# Altium PCB FPGA_Quatro_PCB.PcbDoc (part 2 of 2)
Units mil, origin at the board's own origin, x right, y up, seen from the top; angles counter-clockwise.
Board outline 4724.41 x 3937.01 mil, 4 copper layers (Top Layer, Layer 2, Layer 3, Bottom Layer), stack 65.634 mil thick; 119 components, 184 nets, 749 pads, 206 vias.
Unrouted connection lines stored in the file: 83.
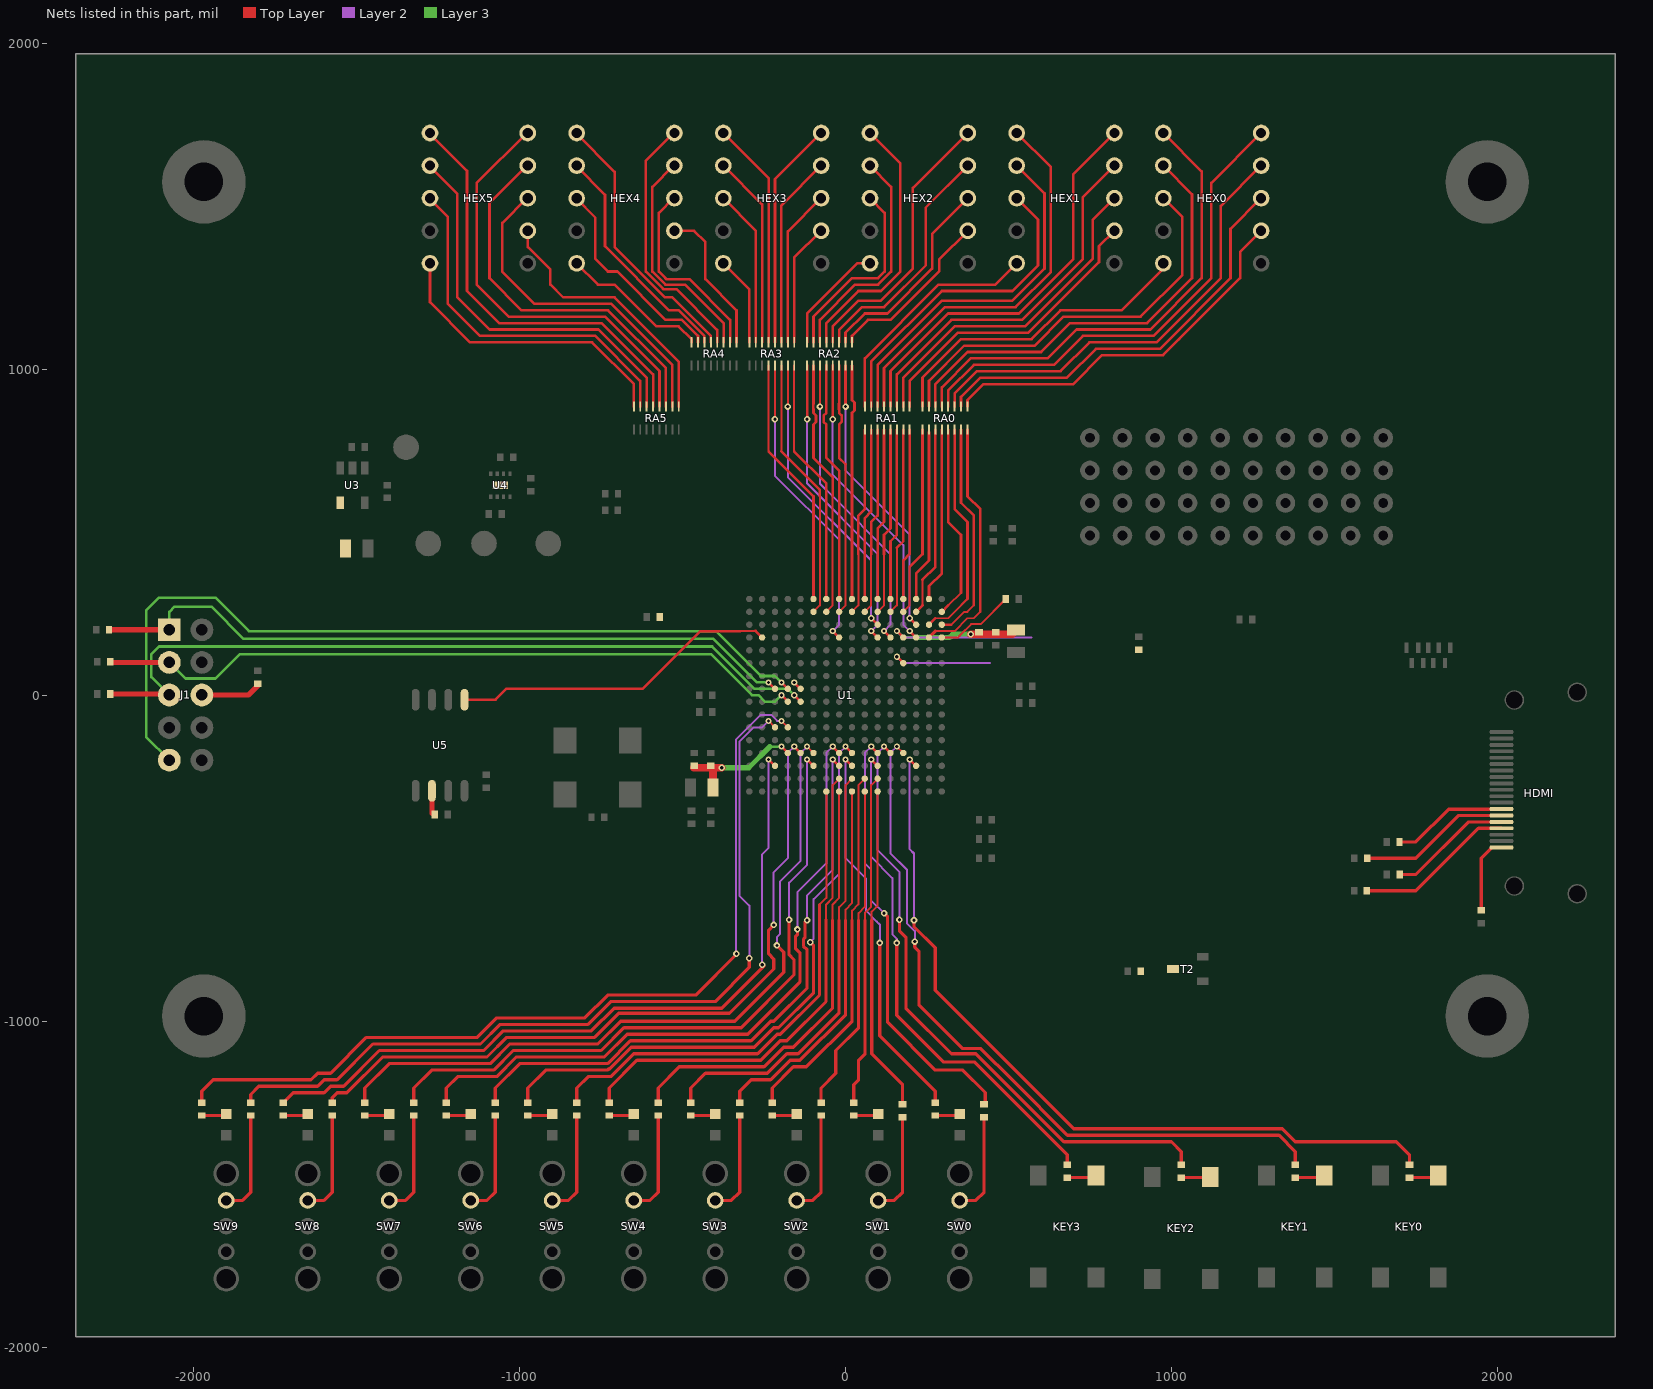
[diagram p4: the nets of this part, all layers, seen from the top]

## Via types
v1: diameter 19, hole 10, Top Layer to Bottom Layer, tented both sides, 111 vias
v2: diameter 20, hole 10, Top Layer to Bottom Layer, tented both sides, 72 vias
v3: diameter 35.43, hole 19.68, Top Layer to Bottom Layer, tented both sides, 23 vias

## Nets (pads, with @x,y where several pads share a name; then routed paths per layer and width w, separated by ;. In a path a pad name is that pad's centre, name@x,y a point inside that pad or via, vN(x,y) a via of type N, cw(c..) or ccw(c..) an arc to the next point about the centre after c; other vN are vias at no path point) (continued)
HEX2.D: RA3.13 U1.D8 | length 932.5
  Top Layer w6: v2(-216.54,846.46) RA3.13@-216.53,1011.81
  Top Layer w8: v1(-39.37,196.85) U1.D8@-19.68,177.16
  Layer 2 w6: v2(-216.54,846.46) -216.54,673.23 -19.68,476.38 -19.68,216.53 v1(-39.37,196.85)
HEX2.DP: RA3.12 U1.A6 | length 773.6
  Top Layer w6: -236.22,748.03 RA3.12@-236.22,1011.81
  Top Layer w8: -236.22,748.03 -98.43,610.24 -98.43,590.55 U1.A6@-98.42,295.28
HEX2.E: RA3.16 U1.A7 | length 757.3
  Top Layer w6: -157.48,748.03 RA3.16@-157.48,1011.81
  Top Layer w8: -157.48,748.03 -59.06,649.61 -59.06,610.24 U1.A7@-59.05,295.28
HEX2.F: RA3.15 U1.C11 | length 909.4
  Top Layer w6: v2(-177.17,885.83) RA3.15@-177.16,1011.81
  Top Layer w8: v1(78.74,236.22) U1.C11@98.43,216.53
  Layer 2 w6: v2(-177.17,885.83) -177.17,669.29 78.74,413.39 v1(78.74,236.22)
HEX2.G: RA3.14 U1.B6 | length 813
  Top Layer w6: -196.85,748.03 RA3.14@-196.85,1011.81 ; U1.B6@-98.42,255.91 -78.74,275.59 -78.74,610.24
  Top Layer w8: -196.85,748.03 -78.74,629.92 -78.74,610.24
HEX3.A: RA2.9 U1.D11 | length 940.6
  Top Layer w8: v2(-118.11,846.46) RA2.9@-118.11,1011.81 ; v1(78.74,196.85) U1.D11@98.43,177.16
  Layer 2 w6: v2(-118.11,846.46) -118.11,657.48 -118.11,649.61 98.43,433.07 98.43,216.53 v1(78.74,196.85)
HEX3.B: RA2.10 U1.B7 | length 795.3
  Top Layer w6: U1.B7@-59.05,255.91 -39.37,275.59 -39.37,610.24
  Top Layer w8: RA2.10@-98.42,1011.81 -98.42,894.43 -98.74,894.11 -98.74,877.54 -98.42,877.23 -98.42,866.14 -90.55,858.27 -90.55,838.58 -98.42,830.71 -98.42,728.35 -39.37,669.29 -39.37,610.24
HEX3.C: RA2.11 U1.D12 | length 940.6
  Top Layer w6: v2(-78.74,885.83) RA2.11@-78.74,1011.81
  Top Layer w8: v1(118.11,196.85) U1.D12@137.8,177.16
  Layer 2 w6: v2(-78.74,885.83) -78.74,649.61 -39.37,610.24 137.8,433.07 137.8,216.53 v1(118.11,196.85)
HEX3.D: RA2.13 U1.D14 | length 940.6
  Top Layer w8: v2(-39.37,846.46) RA2.13@-39.37,1011.81 ; v1(196.85,196.85) U1.D14@216.54,177.16
  Layer 2 w6: v2(-39.37,846.46) -39.37,677.17 177.17,460.63 177.17,216.53 v1(196.85,196.85)
HEX3.DP: RA2.12 U1.A8 | length 739.6
  Top Layer w8: RA2.12@-59.05,1011.81 -59.05,894.43 -58.74,894.11 -58.74,877.54 -59.05,877.23 -59.05,866.14 -66.93,858.27 -66.93,838.58 -59.05,830.71 -59.05,728.35 -19.69,688.98 -19.69,610.24 U1.A8@-19.68,295.28
HEX3.E: RA2.16 U1.A9 | length 723.1
  Top Layer w8: U1.A9@19.69,295.28 19.69,511.81 19.69,866.14 27.56,874.02 27.56,897.64 19.69,905.51 RA2.16@19.69,1011.81
HEX3.F: RA2.15 U1.C14 | length 885
  Top Layer w8: v2(0,885.83) RA2.15@0,1011.81 ; v1(196.85,236.22) U1.C14@216.54,216.53
  Layer 2 w6: v2(0,885.83) 0,688.98 196.85,492.13 v1(196.85,236.22)
HEX3.G: RA2.14 U1.B8 | length 779.3
  Top Layer w6: U1.B8@-19.68,255.91 0,275.59 0,708.66 ; RA2.14@-19.68,1011.81 RA2.14@-19.5,1011.62
  Top Layer w8: RA2.14@-19.68,1011.81 -19.68,894.43 -20,894.11 -20,877.54 -19.68,877.23 -19.68,866.14 -11.81,858.27 -11.81,838.58 -19.69,830.71 -19.69,728.35 0,708.66
HEX4.A: RA1.9 U1.B9 | length 575.4
  Top Layer w6: U1.B9@19.69,255.91 39.37,275.59 39.37,433.07
  Top Layer w8: 39.37,433.07 39.37,551.18 59.06,570.87 RA1.9@59.06,814.96
HEX4.B: RA1.10 U1.A10 | length 527.8
  Top Layer w8: U1.A10@59.06,295.28 59.06,433.07 59.06,543.31 78.74,562.99 78.74,629.92 RA1.10@78.74,814.96
HEX4.C: RA1.11 U1.B10 | length 575.4
  Top Layer w6: U1.B10@59.06,255.91 78.74,275.59 78.74,433.07
  Top Layer w8: 78.74,433.07 78.74,531.5 98.43,551.18 98.43,570.87 RA1.11@98.43,814.96
HEX4.D: RA1.13 U1.B11 | length 575.4
  Top Layer w6: U1.B11@98.43,255.91 118.11,275.59 118.11,433.07
  Top Layer w8: 118.11,433.07 118.11,492.13 137.8,511.81 137.8,629.92 RA1.13@137.8,814.96
HEX4.DP: RA1.12 U1.A11 | length 527.8
  Top Layer w8: U1.A11@98.43,295.28 98.43,433.07 98.43,511.81 118.11,531.5 118.11,629.92 RA1.12@118.11,814.96
HEX4.E: RA1.16 U1.A13 | length 527.8
  Top Layer w8: U1.A13@177.17,295.28 177.17,413.39 196.85,433.07 196.85,629.92 RA1.16@196.85,814.96
HEX4.F: RA1.15 U1.B12 | length 575.4
  Top Layer w6: U1.B12@137.8,255.91 157.48,275.59 157.48,452.76
  Top Layer w8: 157.48,452.76 177.17,472.44 177.17,629.92 RA1.15@177.17,814.96
HEX4.G: RA1.14 U1.A12 | length 527.8
  Top Layer w8: U1.A12@137.8,295.28 137.8,433.07 137.8,472.44 157.48,492.13 157.48,629.92 RA1.14@157.48,814.96
HEX5.A: RA0.9 U1.B13 | length 583.5
  Top Layer w6: U1.B13@177.17,255.91 196.85,275.59 196.85,393.7
  Top Layer w8: 196.85,393.7 236.22,433.07 236.22,570.87 RA0.9@236.22,814.96
HEX5.B: RA0.10 U1.A14 | length 528.1
  Top Layer w8: U1.A14@216.54,295.28 216.54,374.02 255.91,413.39 255.91,570.87 RA0.10@255.91,807.09
HEX5.C: RA0.11 U1.B14 | length 583.5
  Top Layer w6: 236.22,275.59 236.22,354.33
  Top Layer w8: U1.B14@216.54,255.91 236.22,275.59 ; 236.22,354.33 275.59,393.7 275.59,570.87 RA0.11@275.59,814.96
HEX5.D: RA0.13 U1.B16 | length 599.8
  Top Layer w6: 314.96,275.59 354.33,314.96
  Top Layer w8: U1.B16@295.28,255.91 314.96,275.59 ; RA0.13@314.96,814.96 314.96,570.87 314.96,531.5 354.33,492.13 354.33,314.96
HEX5.DP: RA0.12 U1.A15 | length 536
  Top Layer w8: U1.A15@255.91,295.28 255.91,334.65 295.28,374.02 295.28,551.18 RA0.12@295.28,814.96
HEX5.E: RA0.16 U1.D15 | length 765.5
  Top Layer w6: 275.59,196.85 334.65,196.85 374.02,236.22 393.7,236.22 413.39,255.91
  Top Layer w8: RA0.16@374.02,814.96 374.02,610.24 413.39,570.87 413.39,255.91
  Top Layer w10: U1.D15@255.91,177.16 275.59,196.85
HEX5.F: RA0.15 U1.C16 | length 698.3
  Top Layer w6: 324.8,216.53 364.17,255.91 374.02,255.91 393.7,275.59
  Top Layer w8: U1.C16@295.28,216.53 324.8,216.53 ; 354.33,649.61 354.33,629.92 ; RA0.15@354.33,814.96 354.33,629.92 ; 393.7,275.59 393.7,551.18 354.33,590.55 354.33,629.92
HEX5.G: RA0.14 U1.C15 | length 706.4
  Top Layer w6: 275.59,236.22 314.96,236.22 334.65,255.91 374.02,295.28
  Top Layer w8: U1.C15@255.91,216.53 275.59,236.22 ; 334.65,590.55 334.65,570.87 ; RA0.14@334.65,814.96 334.65,570.87 ; 374.02,295.28 374.02,531.5 334.65,570.87
JTAG.TCK: J1.1 R8.2 U1.H3 | length 2203.4
  Top Layer w8: v1(-236.22,39.37) U1.H3@-216.54,19.69
  Top Layer w16: R8.2@-2253.94,200.79 J1.1@-2074.8,200.79
  Layer 3 w8: J1.1@-2074.8,200.79 -2074.8,255.91 -2059.05,271.65 -1944.88,271.65 -1846.46,173.23 -405.51,173.23 -271.65,39.37 v1(-236.22,39.37)
JTAG.TDI: J1.9 U1.H4 | length 2589
  Top Layer w8: v1(-196.85,39.37) U1.H4@-177.17,19.69
  Layer 3 w8: J1.9@-2074.8,-199.21 -2145.67,-128.35 -2145.67,259.84 -2106.3,299.21 -1933.07,299.21 -1830.71,196.85 -397.64,196.85 -259.84,59.06 -216.54,59.06 v1(-196.85,39.37)
JTAG.TDO: J1.3 R6.1 U1.J4 | length 2199.3
  Top Layer w8: v1(-196.85,0) U1.J4@-177.17,-19.68
  Top Layer w16: R6.1@-2248.42,100.79 J1.3@-2074.8,100.79
  Layer 3 w8: J1.3@-2074.8,100.79 -2025.2,51.18 -1933.07,51.18 -1858.27,125.99 -413.39,125.99 -287.4,0 -267.72,0 -248.22,-19.5 -216.35,-19.5 v1(-196.85,0)
JTAG.TMS: J1.5 R5.1 U1.J5 | length 2396.6
  Top Layer w8: v1(-157.48,0) U1.J5@-137.79,-19.68
  Top Layer w16: R5.1@-2250,3.94 -2077.95,3.94 J1.5@-2074.8,0.79
  Layer 3 w8: J1.5@-2074.8,0.79 -2129.92,55.91 -2129.92,125.99 -2106.3,149.61 -409.45,149.61 -279.53,19.69 -177.16,19.69 v1(-157.48,0)
KEY.KEY0: R29.1 U1.P11 | length 1576.3
  Top Layer w8: v1(78.74,-196.85) U1.P11@98.43,-216.53
  Top Layer w10: v2(157.48,-759.84) 157.48,-982.48 300,-1125 395,-1125 680,-1410 R29.1@680,-1440.63
  Layer 2 w6: v1(78.74,-196.85) 78.74,-496.06 143.56,-560.88 143.56,-733.56 157.48,-747.48 v2(157.48,-759.84)
KEY.KEY1: R31.1 U1.N12 | length 1942.3
  Top Layer w8: v1(118.11,-157.48) U1.N12@137.8,-177.16
  Top Layer w10: v2(165.35,-688.97) 165.35,-722.25 185.21,-742.11 185.21,-960.21 325,-1100 400,-1100 670,-1370 1000,-1370 1030,-1400 R31.1@1030,-1440.63
  Layer 2 w6: v1(118.11,-157.48) 98.43,-177.16 98.43,-475.15 165.35,-542.09 v2(165.35,-688.97)
KEY.KEY2: R30.1 U1.N13 | length 2246.7
  Top Layer w6: v1(157.48,-157.48) U1.N13@177.17,-177.16
  Top Layer w10: v2(212.6,-755.9) 212.6,-772.6 225,-785 225,-950 359,-1084 414.71,-1084 512.6,-1181.89 680.71,-1350 1330,-1350 1380,-1400 R30.1@1380,-1440.63
  Layer 2 w6: v1(157.48,-157.48) 137.8,-177.16 137.8,-484.25 188.21,-534.66 188.21,-699.03 212.6,-723.42 v2(212.6,-755.9)
KEY.KEY3: R32.1 U1.P14 | length 2463.2
  Top Layer w8: v1(196.85,-196.85) U1.P14@216.54,-216.53
  Top Layer w10: v2(210,-690) 210,-710 275,-775 275,-905 700,-1330 1340,-1330 1380,-1370 1690,-1370 1730,-1410 R32.1@1730,-1440.63
  Layer 2 w6: v1(196.85,-196.85) 196.85,-472.44 210,-485.59 v2(210,-690)
LEDR.LEDR0: R19.2 U1.L4 | length 2715.3
  Top Layer w6: v1(-196.85,-78.74) U1.L4@-177.17,-98.42
  Top Layer w10: R19.2@-1975,-1250 -1975,-1215 -1940,-1180 -1640,-1180 -1620,-1160 -1580,-1160 -1470,-1050 -1130,-1050 -1070,-990 -800,-990 -730,-920 -460,-920 v2@-333.98,-793.98
  Layer 2 w6: v2(-334.65,-793.31) -336.8,-791.15 -336.8,-136.19 -260.85,-60.24 -228.56,-60.24 -210.06,-78.74 v1(-196.85,-78.74)
LEDR.LEDR1: R21.2 U1.P3 | length 2322.1
  Top Layer w8: v1(-236.22,-196.85) U1.P3@-216.54,-216.53
  Top Layer w10: R21.2@-1725,-1250 -1695,-1220 -1600,-1220 -1580,-1200 -1540,-1200 -1430,-1090 -1110,-1090 -1050,-1030 -780,-1030 -710,-960 -380,-960 v2@-255.91,-835.91 ; v2(-255.91,-826.77) v2@-255.91,-835.91 ; v2@-251.34,-831.34 v2@-255.91,-835.91
  Layer 2 w6: v2(-255.91,-826.77) -255.91,-488.19 -236.22,-468.5 v1(-236.22,-196.85)
LEDR.LEDR2: R23.2 U1.N6 | length 2244.3
  Top Layer w6: v1(-118.11,-157.48) U1.N6@-98.42,-177.16
  Top Layer w10: R23.2@-1475,-1250 -1475,-1205 -1400,-1130 -1090,-1130 -1030,-1070 -760,-1070 -690,-1000 -340,-1000 -190,-850 -190,-788.35 v2(-210.63,-767.72)
  Layer 2 w6: v2(-210.63,-767.72) -210.63,-742.13 -201.47,-732.97 -201.47,-571.55 -137.79,-507.87 -137.79,-177.16 v1(-118.11,-157.48)
LEDR.LEDR3: R25.2 U1.N8 | length 2068.1
  Top Layer w8: v1(-39.37,-157.48) U1.N8@-19.68,-177.16
  Top Layer w10: R25.2@-1225,-1250 -1225,-1205 -1190,-1170 -1070,-1170 -1010,-1110 -740,-1110 -670,-1040 -300,-1040 -242,-982 -140,-880 -140,-790 -153.8,-776.2 -153.8,-741.4 -147.64,-735.25 v2(-147.64,-718.5)
  Layer 2 w6: v2(-147.64,-718.5) -147.64,-604.33 -59.05,-515.75 -59.05,-177.16 v1(-39.37,-157.48)
LEDR.LEDR4: R27.2 U1.N9 | length 1874.9
  Top Layer w8: v1(0,-157.48) U1.N9@19.69,-177.16
  Top Layer w10: R27.2@-975,-1250 -975,-1205 -920,-1150 -730,-1150 -726,-1146 -723.37,-1146 -657.37,-1080 -280,-1080 -220,-1020 -205.67,-1020 -98.19,-912.52 -98.19,-767.95 v2(-108.27,-757.87)
  Layer 2 w6: v2(-108.27,-757.87) -98.19,-747.79 -98.19,-625.75 -19.68,-547.24 -19.68,-177.16 v1(0,-157.48)
LEDR.LEDR5: R20.2 U1.R8 | length 1520.6
  Top Layer w6: -60,-688.98 -60,-642.68 -39.37,-622.05 -39.37,-275.59 U1.R8@-19.68,-255.9
  Top Layer w10: R20.2@-725,-1250 -725,-1205 -640,-1120 -260,-1120 -200,-1060 -180,-1060 -60,-940 -60,-688.98
LEDR.LEDR6: R22.2 U1.R9 | length 1330.4
  Top Layer w6: -20,-690 -20,-649.92 0,-629.92 0,-275.59 U1.R9@19.69,-255.9
  Top Layer w10: R22.2@-475,-1250 -475,-1205 -430,-1160 -240,-1160 -180,-1100 -145.67,-1100 -20,-974.33 -20,-690
LEDR.LEDR7: R24.2 U1.R10 | length 1135.2
  Top Layer w6: 20,-690 20,-661.1 39.37,-641.73 39.37,-275.59 U1.R10@59.06,-255.9
  Top Layer w10: R24.2@-225,-1250 -225,-1205 -160,-1140 -120,-1140 20,-1000 20,-690
LEDR.LEDR8: R26.2 U1.R11 | length 1024.5
  Top Layer w6: 60,-690 60,-667.12 78.74,-648.38 78.74,-275.59 U1.R11@98.43,-255.9
  Top Layer w10: R26.2@25,-1250 25,-1195 40,-1180 40,-1120 60,-1100 60,-690
LEDR.LEDR9: R28.2 U1.P9 | length 1194.9
  Top Layer w8: v1(0,-196.85) U1.P9@19.69,-216.53
  Top Layer w10: v2(105,-759.84) 105,-1045 275,-1215 R28.2@275,-1250
  Layer 2 w6: v1(0,-196.85) 0,-500 62.99,-562.99 62.99,-661.42 96.32,-694.74 105,-703.42 v2(105,-759.84)
NCSO: U1.D2 U5.1 | length 1009.3
  Top Layer w6: -322.83,196.85 -321.99,197.69 -276.43,197.69
  Top Layer w8: U5.1@-1169.09,-13.78 -1073.78,-13.78 -1040,20 -621.73,20 -444.88,196.85 -322.83,196.85 ; -276.43,197.69 U1.D2@-255.91,177.16
NetHDMI_13: HDMI.13 R40.1 | length 354.3
  Top Layer w10: R40.1@1700,-450 1750,-450 1850,-350 2011.81,-350 HDMI.13@2012.6,-349.21
NetHDMI_14: HDMI.14 R39.1 | length 466.9
  Top Layer w10: R39.1@1600,-500 1750,-500 1881.1,-368.9 HDMI.14@2012.6,-368.9
NetHDMI_15: HDMI.15 R38.1 | length 379.5
  Top Layer w10: R38.1@1700,-550 1750,-550 1911.42,-388.58 HDMI.15@2012.6,-388.58
NetHDMI_16: HDMI.16 R37.1 | length 492
  Top Layer w10: R37.1@1600,-600 1750,-600 1941.73,-408.27 HDMI.16@2012.6,-408.27
NetHDMI_19: HDMI.19 R36.1 | length 236.1
  Top Layer w10: R36.1@1950,-660 1950,-500 1982.68,-467.32 HDMI.19@2012.6,-467.32
NetHEX0_1: HEX0.1 RA0.5 | length 1489.1
  Top Layer w8: RA0.5@295.28,885.83 295.28,944.88 383.86,1033.46 620.08,1033.46 708.66,1122.05 935.04,1122.05 1092.52,1279.53 1092.52,1607.48 HEX0.1@975,1725
NetHEX0_2: HEX0.2 RA0.6 | length 1372.8
  Top Layer w8: RA0.6@275.59,885.83 275.59,954.73 374.02,1053.15 600.39,1053.15 688.98,1141.73 925.2,1141.73 1062.99,1279.53 1062.99,1537.01 HEX0.2@975,1625
NetHEX0_3: HEX0.3 RA0.7 | length 1250.7
  Top Layer w8: RA0.7@255.91,885.83 255.91,964.57 364.17,1072.83 580.71,1072.83 669.29,1161.42 905.51,1161.42 1033.46,1289.37 1033.46,1466.54 HEX0.3@975,1525
NetHEX0_5: HEX0.5 RA0.8 | length 981.6
  Top Layer w8: RA0.8@236.22,885.83 236.22,974.41 354.33,1092.52 570.87,1092.52 659.45,1181.1 846.46,1181.1 975,1309.65 HEX0.5@975,1325
NetHEX0_7: HEX0.7 RA0.1 | length 1183.4
  Top Layer w8: RA0.1@374.02,885.83 374.02,905.51 423.23,954.72 698.82,954.72 787.4,1043.31 974.41,1043.31 1023.62,1092.52 1210.63,1279.53 1210.63,1360.63 HEX0.7@1275,1425
NetHEX0_8: HEX0.8 RA0.2 | length 1291.5
  Top Layer w8: RA0.2@354.33,885.83 354.33,915.36 413.39,974.41 679.13,974.41 767.72,1062.99 964.57,1062.99 1181.1,1279.53 1181.1,1431.1 HEX0.8@1275,1525
NetHEX0_9: HEX0.9 RA0.3 | length 1399.7
  Top Layer w8: RA0.3@334.65,885.83 334.65,925.2 403.54,994.09 659.45,994.09 748.03,1082.68 954.72,1082.68 1151.57,1279.53 1151.57,1501.57 HEX0.9@1275,1625
NetHEX0_10: HEX0.10 RA0.4 | length 1507.8
  Top Layer w8: RA0.4@314.96,885.83 314.96,935.04 393.7,1013.78 639.76,1013.78 728.35,1102.36 944.88,1102.36 1122.05,1279.53 1122.05,1572.05 HEX0.10@1275,1725
NetHEX1_1: HEX1.1 RA1.5 | length 1221.5
  Top Layer w8: RA1.5@118.11,885.83 118.11,1003.94 305.12,1190.94 521.65,1190.94 629.92,1299.21 629.92,1620.08 HEX1.1@525,1725
NetHEX1_2: HEX1.2 RA1.6 | length 1113.3
  Top Layer w8: RA1.6@98.43,885.83 98.43,1013.78 295.27,1210.63 511.81,1210.63 610.24,1309.05 610.24,1539.76 HEX1.2@525,1625
NetHEX1_3: HEX1.3 RA1.7 | length 1005.2
  Top Layer w8: RA1.7@78.74,885.83 78.74,1023.62 295.28,1240.16 511.81,1240.16 590.55,1318.9 590.55,1459.45 HEX1.3@525,1525
NetHEX1_5: HEX1.5 RA1.8 | length 734.3
  Top Layer w8: RA1.8@59.06,885.83 59.06,1033.46 285.43,1259.84 459.84,1259.84 HEX1.5@525,1325
NetHEX1_7: HEX1.7 RA1.1 | length 926.2
  Top Layer w8: RA1.1@196.85,885.83 196.85,964.57 344.49,1112.2 560.91,1112.2 643.81,1195.1 643.92,1195.1 777.56,1328.74 777.56,1377.56 HEX1.7@825,1425
NetHEX1_8: HEX1.8 RA1.2 | length 1034.4
  Top Layer w8: RA1.2@177.17,885.83 177.17,974.41 334.64,1131.89 551.18,1131.89 757.87,1338.58 757.87,1457.87 HEX1.8@825,1525
NetHEX1_9: HEX1.9 RA1.3 | length 1142.5
  Top Layer w8: RA1.3@157.48,885.83 157.48,984.25 324.8,1151.57 541.34,1151.57 728.35,1338.58 728.35,1528.35 HEX1.9@825,1625
NetHEX1_10: HEX1.10 RA1.4 | length 1250.7
  Top Layer w8: RA1.4@137.8,885.83 137.8,994.09 314.96,1171.26 531.5,1171.26 698.82,1338.58 698.82,1598.82 HEX1.10@825,1725
NetHEX2_1: HEX2.1 RA2.5 | length 814.7
  Top Layer w8: RA2.5@-59.05,1082.68 -59.05,1141.73 39.37,1240.16 108.27,1240.16 167.32,1299.21 167.32,1632.68 HEX2.1@75,1725
NetHEX2_2: HEX2.2 RA2.6 | length 701
  Top Layer w8: RA2.6@-78.74,1082.68 -78.74,1151.57 29.68,1260 100,1260 140,1300 140,1560 HEX2.2@75,1625
NetHEX2_3: HEX2.3 RA2.7 | length 598.2
  Top Layer w8: RA2.7@-98.42,1082.68 -98.42,1161.42 19.68,1279.53 99.53,1279.53 120,1300 120,1480 HEX2.3@75,1525
NetHEX2_5: HEX2.5 RA2.8 | length 345.4
  Top Layer w8: RA2.8@-118.11,1082.68 -118.11,1171.26 35.63,1325 HEX2.5@75,1325
NetHEX2_7: HEX2.7 RA2.1 | length 529.9
  Top Layer w8: RA2.1@19.69,1082.68 19.69,1102.36 68.9,1151.57 137.8,1151.57 287.01,1300.79 287.01,1337.01 HEX2.7@375,1425
NetHEX2_8: HEX2.8 RA2.2 | length 638
  Top Layer w8: RA2.2@0,1082.68 0,1112.2 59.06,1171.26 127.95,1171.26 265.75,1309.06 265.75,1415.75 HEX2.8@375,1525
NetHEX2_9: HEX2.9 RA2.3 | length 745.2
  Top Layer w8: RA2.3@-19.68,1082.68 -19.68,1120.32 50.95,1190.94 118.11,1190.94 246.06,1318.9 246.06,1496.06 HEX2.9@375,1625
NetHEX2_10: HEX2.10 RA2.4 | length 854.3
  Top Layer w8: RA2.4@-39.37,1082.68 -39.37,1131.89 39.37,1210.63 108.27,1210.63 206.69,1309.06 206.69,1556.69 HEX2.10@375,1725
NetHEX3_1: HEX3.1 RA3.5 | length 699.8
  Top Layer w8: HEX3.1@-375,1725 -236.22,1586.22 RA3.5@-236.22,1082.68
NetHEX3_2: HEX3.2 RA3.6 | length 591.7
  Top Layer w8: HEX3.2@-375,1625 -255.91,1505.91 ; RA3.6@-255.91,1082.68 -255.91,1505.91
NetHEX3_3: HEX3.3 RA3.7 | length 483.5
  Top Layer w8: HEX3.3@-375,1525 -275.59,1425.59 RA3.7@-275.59,1082.68
NetHEX3_5: HEX3.5 RA3.8 | length 275.3
  Top Layer w8: HEX3.5@-375,1325 -295.28,1245.28 RA3.8@-295.28,1082.68
NetHEX3_7: HEX3.7 RA3.1 | length 376.5
  Top Layer w8: RA3.1@-157.48,1082.68 -157.48,1338.58 -157.48,1342.52 HEX3.7@-75,1425
NetHEX3_8: HEX3.8 RA3.2 | length 484.6
  Top Layer w8: RA3.2@-177.16,1082.68 -177.16,1422.84 HEX3.8@-75,1525
NetHEX3_9: HEX3.9 RA3.3 | length 592.5
  Top Layer w8: RA3.3@-196.85,1082.68 -196.85,1501.77 -195.47,1504.53 HEX3.9@-75,1625
NetHEX3_10: HEX3.10 RA3.4 | length 700.9
  Top Layer w8: RA3.4@-216.53,1082.68 -216.53,1583.47 HEX3.10@-75,1725
NetHEX4_1: HEX4.1 RA4.5 | length 826.8
  Top Layer w8: HEX4.1@-827.76,1725 -708.66,1605.91 -708.66,1375.91 -553.23,1220.47 -531.27,1220.47 -413.39,1102.59 RA4.5@-413.39,1082.68
NetHEX4_2: HEX4.2 RA4.6 | length 723.2
  Top Layer w8: HEX4.2@-827.76,1625 -738.19,1535.43 -738.19,1377.95 -541.34,1181.1 -511.7,1181.1 -433.07,1102.48 RA4.6@-433.07,1082.68
NetHEX4_3: HEX4.3 RA4.7 | length 643.8
  Top Layer w8: HEX4.3@-827.76,1525 -767.72,1464.96 -767.72,1338.58 -729.13,1300 -700.39,1300 -551.97,1151.57 -501.97,1151.57 -452.76,1102.36 RA4.7@-452.76,1082.68
NetHEX4_5: HEX4.5 RA4.8 | length 458.7
  Top Layer w8: HEX4.5@-825,1325 -759.84,1259.84 -708.66,1259.84 -580.71,1131.89 -511.81,1131.89 -472.44,1092.52 RA4.8@-472.44,1082.68
NetHEX4_7: HEX4.7 RA4.1 | length 456.3
  Top Layer w8: HEX4.7@-525,1425 -465,1425 -430,1390 -430,1276.46 -334.65,1181.1 RA4.1@-334.65,1082.68
NetHEX4_8: HEX4.8 RA4.2 | length 592.4
  Top Layer w8: HEX4.8@-527.76,1525 -572.76,1480 -572.76,1300 -552.28,1279.53 -549.39,1276.63 -479.39,1276.63 -354.33,1151.58 RA4.2@-354.33,1082.68
NetHEX4_9: HEX4.9 RA4.3 | length 695.3
  Top Layer w8: HEX4.9@-527.76,1625 -592.76,1560 -592.76,1300 -552.76,1260 -492.28,1260 -374.02,1141.73 RA4.3@-374.02,1082.68
NetHEX4_10: HEX4.10 RA4.4 | length 791.7
  Top Layer w8: HEX4.10@-527.76,1725 -612.76,1640 -612.76,1300 -560.26,1247.5 -560.05,1247.5 -558.55,1246 -518.76,1246 -393.7,1120.94 RA4.4@-393.7,1082.68
NetHEX5_1: HEX5.1 RA5.5 | length 1308.3
  Top Layer w8: HEX5.1@-1277.76,1725 -1161.42,1608.66 -1161.42,1240.16 -1062.99,1141.73 -748.03,1141.73 -590.55,984.25 RA5.5@-590.55,885.83
NetHEX5_2: HEX5.2 RA5.6 | length 1211.7
  Top Layer w8: HEX5.2@-1277.76,1625 -1276.38,1623.62 -1190.94,1538.19 -1190.94,1220.47 -1092.52,1122.05 -757.87,1122.05 -610.24,974.41 RA5.6@-610.23,885.83
NetHEX5_3: HEX5.3 RA5.7 | length 1115.1
  Top Layer w8: HEX5.3@-1277.76,1525 -1276.38,1523.62 -1220.47,1467.72 -1220.47,1200.79 -1122.05,1102.36 -767.71,1102.36 -629.92,964.56 RA5.7@-629.92,885.83
NetHEX5_5: HEX5.5 RA5.8 | length 917.3
  Top Layer w8: HEX5.5@-1275,1325 -1275,1206.1 -1151.58,1082.68 -777.56,1082.68 -649.61,954.72 RA5.8@-649.6,885.83
NetHEX5_7: HEX5.7 RA5.1 | length 823.3
  Top Layer w8: HEX5.7@-975,1425 -975,1375.33 -905.51,1305.85 -905.51,1259.84 -866.14,1220.47 -708.66,1220.47 -511.81,1023.62 RA5.1@-511.81,885.83
NetHEX5_8: HEX5.8 RA5.2 | length 1024.9
  Top Layer w8: HEX5.8@-977.76,1525 -1053.15,1449.61 -1053.15,1299.21 -954.72,1200.79 -718.5,1200.79 -531.5,1013.78 RA5.2@-531.49,885.83
NetHEX5_9: HEX5.9 RA5.3 | length 1166.6
  Top Layer w8: HEX5.9@-977.76,1625 -1092.52,1510.23 -1092.52,1279.53 -994.09,1181.1 -728.35,1181.1 -551.18,1003.94 RA5.3@-551.18,885.83
NetHEX5_10: HEX5.10 RA5.4 | length 1308.4
  Top Layer w8: HEX5.10@-977.76,1725 -1131.89,1570.87 -1131.89,1259.84 -1033.46,1161.42 -738.19,1161.42 -570.87,994.09 RA5.4@-570.86,885.83
NetJ1_6: J1.6 R7.2 | length 183.6
  Top Layer w16: J1.6@-1974.8,0.79 -1831.89,0.79 R7.2@-1803.15,29.53
NetKEY0_4: KEY0.4 R32.2 | length 91.3
  Top Layer w10: R32.2@1730,-1480 1812.09,-1480 KEY0.4@1818.58,-1473.5
NetKEY1_4: KEY1.4 R30.2 | length 91.3
  Top Layer w10: R30.2@1380,-1480 1462.09,-1480 KEY1.4@1468.58,-1473.5
NetKEY2_4: KEY2.4 R31.2 | length 89.3
  Top Layer w10: R31.2@1030,-1480 1116.8,-1480 KEY2.4@1118.56,-1478.23
NetKEY3_4: KEY3.4 R29.2 | length 91.3
  Top Layer w10: R29.2@680,-1480 762.09,-1480 KEY3.4@768.58,-1473.5
NetL1_1: L1.1 U3.4
NetLEDR0_A: LEDR0.A R28.1 | length 76.8
  Top Layer w10: R28.1@275,-1289.37 345.67,-1289.37 LEDR0.A@350,-1285.04
NetLEDR1_A: LEDR1.A R26.1 | length 76.8
  Top Layer w10: R26.1@25,-1289.37 95.67,-1289.37 LEDR1.A@100,-1285.04
NetLEDR2_A: LEDR2.A R24.1 | length 76.8
  Top Layer w10: R24.1@-225,-1289.37 -154.33,-1289.37 LEDR2.A@-150,-1285.04
NetLEDR3_A: LEDR3.A R22.1 | length 76.8
  Top Layer w10: R22.1@-475,-1289.37 -404.33,-1289.37 LEDR3.A@-400,-1285.04
NetLEDR4_A: LEDR4.A R20.1 | length 76.8
  Top Layer w10: R20.1@-725,-1289.37 -654.33,-1289.37 LEDR4.A@-650,-1285.04
NetLEDR5_A: LEDR5.A R27.1 | length 76.8
  Top Layer w10: R27.1@-975,-1289.37 -904.33,-1289.37 LEDR5.A@-900,-1285.04
NetLEDR6_A: LEDR6.A R25.1 | length 76.8
  Top Layer w10: R25.1@-1225,-1289.37 -1154.33,-1289.37 LEDR6.A@-1150,-1285.04
NetLEDR7_A: LEDR7.A R23.1 | length 76.8
  Top Layer w10: R23.1@-1475,-1289.37 -1404.33,-1289.37 LEDR7.A@-1400,-1285.04
NetLEDR8_A: LEDR8.A R21.1 | length 76.8
  Top Layer w10: R21.1@-1725,-1289.37 -1654.33,-1289.37 LEDR8.A@-1650,-1285.04
NetLEDR9_A: LEDR9.A R19.1 | length 76.8
  Top Layer w10: R19.1@-1975,-1289.37 -1904.33,-1289.37 LEDR9.A@-1900,-1285.04
NetR1_1: R1.1 U1.D16 | length 245.9
  Top Layer w6: U1.D16@295.28,177.16 344.49,177.16 354.25,186.92 354.25,187.09 385,217.85 414.7,217.85 R1.1@492.13,295.28
NetR2_1: R2.1 U1.H5 | length 27.8
  Top Layer w8: v1(-157.48,39.37) U1.H5@-137.79,19.69
NetR3_1: R3.1 U1.F13 | length 321.4
  Top Layer w8: v1(157.48,118.11) U1.F13@177.17,98.43
  Layer 2 w6: v1(157.48,118.11) 177.17,98.43 442.91,98.43
NetR4_2: R4.2 U5.6 | length 69.5
  Top Layer w16: R4.2@-1269.09,-362.8 U5.6@-1269.09,-293.31
NetR9_2: R9.2 SW9.1 | length 321
  Top Layer w10: SW9.1@-1900,-1550 -1850,-1550 -1825,-1525 R9.2@-1825,-1289.37
NetR10_2: R10.2 SW4.1 | length 321
  Top Layer w10: SW4.1@-650,-1550 -600,-1550 -575,-1525 R10.2@-575,-1289.37
NetR11_2: R11.2 SW8.1 | length 321
  Top Layer w10: SW8.1@-1650,-1550 -1600,-1550 -1575,-1525 R11.2@-1575,-1289.37
NetR12_2: R12.2 SW3.1 | length 321
  Top Layer w10: SW3.1@-400,-1550 -350,-1550 -325,-1525 R12.2@-325,-1289.37
NetR13_2: R13.2 SW7.1 | length 321
  Top Layer w10: SW7.1@-1400,-1550 -1350,-1550 -1325,-1525 R13.2@-1325,-1289.37
NetR14_2: R14.2 SW2.1 | length 321
  Top Layer w10: SW2.1@-150,-1550 -100,-1550 -75,-1525 R14.2@-75,-1289.37
NetR15_2: R15.2 SW6.1 | length 321
  Top Layer w10: SW6.1@-1150,-1550 -1100,-1550 -1075,-1525 R15.2@-1075,-1289.37
NetR16_2: R16.2 SW1.1 | length 315.7
  Top Layer w10: SW1.1@100,-1550 150,-1550 175,-1525 R16.2@175,-1294.68
NetR17_2: R17.2 SW5.1 | length 321
  Top Layer w10: SW5.1@-900,-1550 -850,-1550 -825,-1525 R17.2@-825,-1289.37
NetR18_2: R18.2 SW0.1 | length 315.7
  Top Layer w10: SW0.1@350,-1550 400,-1550 425,-1525 R18.2@425,-1294.68
NetR35_2: R35.2 T2.3
PAD_NC: U4.9
SW.SW0: R9.1 U1.L3 | length 2564.8
  Top Layer w6: v1(-236.22,-78.74) U1.L3@-216.54,-98.42
  Top Layer w10: R9.1@-1825,-1250 -1825,-1225 -1800,-1200 -1620,-1200 -1600,-1180 -1560,-1180 -1450,-1070 -1120,-1070 -1060,-1010 -790,-1010 -720,-940 -400,-940 -295.27,-835.27 v2(-295.27,-807.09)
  Layer 2 w6: v2(-295.27,-807.09) -295.27,-645.67 -324.8,-616.14 -324.8,-141.16 -282.07,-98.42 -255.91,-98.42 v1(-236.22,-78.74)
SW.SW1: R11.1 U1.N5 | length 2283.3
  Top Layer w8: v1(-157.48,-157.48) U1.N5@-137.79,-177.16
  Top Layer w10: R11.1@-1575,-1250 -1575,-1235 -1560,-1220 -1530,-1220 -1420,-1110 -1100,-1110 -1040,-1050 -770,-1050 -696,-976 -356,-976 -220,-840 -220,-810 -236.22,-793.78 -236.22,-720.47 v2(-220.47,-704.72)
  Layer 2 w6: v2(-220.47,-704.72) -220.47,-543.31 -177.16,-500 -177.16,-177.16 v1(-157.48,-157.48)
SW.SW2: R13.1 U1.P6 | length 2073.7
  Top Layer w8: v1(-118.11,-196.85) U1.P6@-98.42,-216.53
  Top Layer w10: R13.1@-1325,-1250 -1325,-1205 -1270,-1150 -1080,-1150 -1020,-1090 -750,-1090 -680,-1020 -320,-1020 -158.19,-858.19 -158.19,-811.81 -173.23,-796.77 v2(-173.23,-688.98)
  Layer 2 w6: v2(-173.23,-688.98) -173.23,-574.8 -118.11,-519.68 v1(-118.11,-196.85)
SW.SW3: R15.1 U1.P8 | length 1899.9
  Top Layer w8: v1(-39.37,-196.85) U1.P8@-19.68,-216.53
  Top Layer w10: R15.1@-1075,-1250 -1075,-1205 -1000,-1130 -730,-1130 -660,-1060 -290,-1060 -230,-1000 -220,-1000 -118.19,-898.19 -118.19,-780.58 -129.27,-769.5 -129.27,-749.18 -124.67,-744.58 -124.67,-696.48 v2(-118.19,-690)
  Layer 2 w6: v2(-118.19,-690) -118.11,-689.92 -118.11,-614.17 -39.37,-535.43 v1(-39.37,-196.85)
SW.SW4: R17.1 U1.T7 | length 1541.5
  Top Layer w6: -80,-642.99 -59.05,-622.05 U1.T7@-59.05,-295.27
  Top Layer w10: R17.1@-825,-1250 -825,-1205 -790,-1170 -720,-1170 -650,-1100 -270,-1100 -210,-1040 -200,-1040 -80,-920 -80,-642.99
SW.SW5: R10.1 U1.T8 | length 1354.6
  Top Layer w6: -40,-690 -40,-642.36 -19.68,-622.05 U1.T8@-19.68,-295.27
  Top Layer w10: R10.1@-575,-1250 -575,-1205 -510,-1140 -250,-1140 -190,-1080 -160,-1080 -40,-960 -40,-690
SW.SW6: R12.1 U1.T9 | length 1150.2
  Top Layer w6: 0,-690 0,-657.48 19.69,-637.8 U1.T9@19.69,-295.27
  Top Layer w10: R12.1@-325,-1250 -325,-1215 -290,-1180 -230,-1180 -170,-1120 -140,-1120 0,-980 0,-690
SW.SW7: R14.1 U1.T10 | length 1010.3
  Top Layer w6: 40,-690 40,-668.66 59.06,-649.61 U1.T10@59.06,-295.27
  Top Layer w10: R14.1@-75,-1250 -75,-1205 -30,-1160 -30,-1090 40,-1020 40,-690
SW.SW8: R16.1 U1.T11 | length 1007
  Top Layer w6: 80,-690 80,-664.09 98.43,-645.67 U1.T11@98.43,-295.27
  Top Layer w10: 80,-690 80,-1100 175,-1195 R16.1@175,-1255.31
SW.SW9: R18.1 U1.N11 | length 1338.3
  Top Layer w8: v1(78.74,-157.48) U1.N11@98.43,-177.16
  Top Layer w10: v2(118.11,-669.29) 128.8,-679.98 128.8,-1003.8 275,-1150 360,-1150 428.8,-1218.8 428.8,-1251.52 R18.1@425,-1255.31
  Layer 2 w6: v1(78.74,-157.48) 59.06,-177.16 59.06,-515.75 78.74,-535.43 78.74,-629.92 v2(118.11,-669.29)
VDD_PLL1: C4.1 C5.1 FB1.2 U1.N4 | length 386.3
  Top Layer w8: v1(-196.85,-157.48) U1.N4@-177.17,-177.16
  Top Layer w24: C4.1@-464.57,-222.44 C5.1@-413.39,-222.44 ; FB1.2@-406.5,-283.47 -406.5,-229.33 C5.1@-413.39,-222.44 ; v2(-379.92,-222.44) C5.1@-413.39,-222.44
  Layer 3 w8: -232.28,-157.48 v1(-196.85,-157.48)
  Layer 3 w16: v2(-379.92,-222.44) -297.24,-222.44 -232.28,-157.48
VDD_PLL2: C6.1 C7.1 FB2.2 U1.D13 | length 833.1
  Top Layer w8: v1(157.48,196.85) U1.D13@177.17,177.16
  Top Layer w24: v2(383.86,187.01) 460.63,187.01 510.83,187.01 FB2.2@523.62,199.8
  Layer 2 w6: v1(157.48,196.85) 177.17,177.16 570.87,177.16
  Layer 3 w8: v1(157.48,196.85) 177.17,177.16 216.54,177.16
  Layer 3 w16: 216.54,177.16 318.9,177.16 328.74,187.01 v2(383.86,187.01)
pads on no net: H1.1 H1.2 H1.3 H1.4 H1.5 H1.6 H1.7 H1.8 H1.9 H1.10 H2.1 H2.2 H2.3 H2.4 H2.5 H2.6 H2.7 H2.8 H2.9 H2.10 H3.1 H3.2 H3.3 H3.4 H3.5 H3.6 H3.7 H3.8 H3.9 H3.10 H4.1 H4.2 H4.3 H4.4 H4.5 H4.6 H4.7 H4.8 H4.9 H4.10 HEX0.4 HEX1.4 HEX2.4 HEX3.4 HEX4.4 HEX5.4 J1.7 J1.8 KEY0.1 KEY0.3 KEY1.1 KEY1.3 KEY2.1 KEY2.3 KEY3.1 KEY3.3 SW0.3 SW0.NC SW1.3 SW1.NC SW2.3 SW2.NC SW3.3 SW3.NC SW4.3 SW4.NC SW5.3 SW5.NC SW6.3 SW6.NC SW7.3 SW7.NC SW8.3 SW8.NC SW9.3 SW9.NC U1.C9 U1.D1 U1.D9 U1.E6 U1.E7 U1.E8 U1.E9 U1.E10 U1.E11 U1.F1 U1.F2 U1.F5 U1.F6 U1.F7 U1.F8 U1.F9 U1.F10 U1.F11 U1.F14 U1.F15 U1.F16 U1.G1 U1.G2 U1.G5 U1.G11 U1.G15 U1.G16 U1.H14 U1.J1 U1.J2 U1.J6 U1.J11 U1.J12 U1.J13 U1.J14 U1.J16 U1.K1 U1.K2 U1.K5 U1.K6 U1.K8 U1.K9 U1.K10 U1.K11 U1.K12 U1.L1 U1.L2 U1.L6 U1.L7 U1.L8 U1.L9 U1.L10 U1.L11 U1.L12 U1.L13 U1.L14 U1.M6 U1.M7 U1.M8 U1.M9 U1.M10 U1.M11 U1.M12 U1.N1 U1.N2 U1.N3 U1.N14 U1.P1 U1.P2 U1.R1 U1.R3 U1.R4 U1.R5 U1.R6 U1.R7 U1.R12 U1.R13 U1.R14 U1.R16 U1.T2 U1.T3 U1.T4 U1.T5 U1.T6 U1.T12 U1.T13 U1.T14 U1.T15 U4.3 U4.6
copper on no net: | length 13725.8
  Top Layer w6: -417.32,78.74 -275.59,78.74 -255.91,59.06 ; -417.32,118.11 -275.59,118.11 -255.91,98.43 ; -356.49,-334.64 -356.49,-189.16 -325.65,-158.32 -276.43,-158.32 -275.59,-157.48 -255.91,-177.16 ; -344.49,-338.58 -344.49,-196.85 -324.8,-177.16 -295.28,-177.16 ; -332.49,-343.55 -332.49,-214.38 -314.96,-196.85 -275.59,-196.85 -255.91,-216.53 ; -314.96,-354.33 -314.96,-236.22 -295.28,-216.53 ; -255.91,-457.54 -255.91,-295.27 ; -236.22,-465.7 -236.22,-275.59 -216.54,-255.9 ; -216.54,-473.85 -216.54,-295.27 ; -196.85,-482.01 -196.85,-275.59 -177.17,-255.9 ; -177.17,-490.16 -177.17,-295.27 ; -157.48,-498.31 -157.48,-275.59 -137.79,-255.9 ; -137.79,-506.47 -137.79,-295.27 ; -118.11,-514.62 -118.11,-275.59 -98.42,-255.9 ; -98.42,-522.77 -98.42,-295.27 ; -78.74,-530.93 -78.74,-275.59 -59.05,-255.9 ; 137.8,-295.27 137.8,-512.65 302.31,-677.16 409.45,-677.16 ; 137.8,-255.9 118.11,-275.59 118.11,-520.8 294.16,-696.85 409.45,-696.85 ; 177.17,-295.27 177.17,-496.34 318.62,-637.8 409.45,-637.8 ; 177.17,-255.9 157.48,-275.59 157.48,-504.5 310.46,-657.48 409.45,-657.48 ; 216.54,-295.27 216.54,-480.03 334.93,-598.42 409.45,-598.42 ; 216.54,-255.9 196.85,-275.59 196.85,-488.19 326.77,-618.11 409.45,-618.11 ; 255.91,-295.27 255.91,-369.09 255.91,-491.57 343.08,-578.74 409.45,-578.74 ; 255.91,59.06 275.59,39.37 417.32,39.37 ; 255.91,98.43 275.59,78.74 417.32,78.74 ; 275.59,-413.39 275.59,-483.41 351.23,-559.05 409.45,-559.05 ; 275.59,-413.38 275.59,-275.59 295.28,-255.9 ; 295.28,-19.68 458.93,-19.69 557.36,-118.11 669.29,-118.11 ; 295.28,59.06 413.39,59.06 ; 295.28,98.43 413.39,98.43
  Top Layer w8: v1(-157.48,-39.37) -137.79,-59.05 ; v1(-157.48,78.74) -137.79,59.06 ; v1(-157.48,118.11) -137.79,98.43 ; v1(-118.11,-118.11) -98.42,-137.8 ; v1(-118.11,-78.74) -98.42,-98.42 ; v1(-118.11,-39.37) -98.42,-59.05 ; v1(-118.11,0) -98.42,-19.68 ; v1(-118.11,118.11) -98.42,98.43 ; v1(-118.11,157.48) -98.42,137.8 ; v1(-78.74,-118.11) -59.05,-137.8 ; v1(-78.74,-78.74) -59.05,-98.42 ; v1(-78.74,118.11) -59.05,98.43 ; v1(-78.74,157.48) -59.05,137.8 ; v1(-39.37,-118.11) -19.68,-137.8 ; v1(-39.37,-78.74) -19.68,-98.42 ; v1(-39.37,-39.37) -19.68,-59.05 ; v1(-39.37,118.11) -19.68,98.43 ; v1(-39.37,157.48) -19.68,137.8 ; v1(0,-118.11) 19.69,-137.8 ; v1(0,-78.74) 19.69,-98.42 ; v1(0,-39.37) 19.69,-59.05 ; v1(0,118.11) 19.69,98.43 ; v1(0,157.48) 19.69,137.8 ; v1(0,196.85) 19.69,177.16 ; v1(0,236.22) 19.69,216.53 ; v1(39.37,-118.11) 59.06,-137.8 ; v1(39.37,-78.74) 59.06,-98.42 ; v1(39.37,-39.37) 59.06,-59.05 ; v1(39.37,118.11) 59.06,98.43 ; v1(39.37,157.48) 59.06,137.8 ; v1(78.74,-118.11) 98.43,-137.8 ; v1(78.74,-78.74) 98.43,-98.42 ; v1(78.74,-39.37) 98.43,-59.05 ; v1(78.74,0) 98.43,-19.68 ; v1(78.74,78.74) 98.43,59.06 ; v1(78.74,118.11) 98.43,98.43 ; v1(78.74,157.48) 98.43,137.8 ; v1(118.11,-118.11) 137.8,-137.8 ; v1(118.11,-78.74) 137.8,-98.42 ; v1(118.11,-39.37) 137.8,-59.05 ; v1(118.11,0) 137.8,-19.68 ; v1(157.48,-78.74) 177.17,-98.42 ; v1(157.48,0) 177.17,-19.68 ; v1(196.85,-157.48) 216.54,-177.16 ; v1(196.85,-78.74) 216.54,-98.42 ; v1(196.85,0) 216.54,-19.68 ; v1(196.85,39.37) 216.54,19.69 ; v1(196.85,118.11) 216.54,98.43
  Top Layer w10: -393.7,-659.45 -207.26,-659.45 -78.74,-530.93 ; -393.7,-639.77 -215.42,-639.77 -98.42,-522.77 ; -393.7,-620.08 -223.57,-620.08 -118.11,-514.62 ; -393.7,-600.4 -231.72,-600.4 -137.79,-506.47 ; -393.7,-580.71 -239.88,-580.71 -157.48,-498.31 ; -393.7,-561.03 -248.03,-561.03 -177.17,-490.16 ; -393.7,-541.34 -256.18,-541.34 -196.85,-482.01 ; -393.7,-521.66 -264.34,-521.66 -216.54,-473.85 ; -393.7,-501.97 -272.49,-501.97 -236.22,-465.7 ; -393.7,-482.28 -280.65,-482.28 -255.91,-457.54
  Layer 2 w6: v1(0,196.85) 20.33,217.18 ; v1(157.48,-78.74) 177.17,-98.42 442.91,-98.42 ; v1(157.48,0) 177.17,-19.68 442.91,-19.68 ; v1(196.85,-157.48) 413.39,-157.48
  Layer 3 w6: 98.43,-442.91 98.43,-137.8 v1(118.11,-118.11) ; v1(118.11,-39.37) 137.8,-59.05 383.86,-59.05

## Polygon pours and split planes (outlines as drawn)
1V2 on Layer 3 "1V2_L03_P000" (solid, pour order 0): -157.48,118.11 -157.48,-78.74 118.11,-78.74 118.11,118.11
3V3 on Layer 3 "NONET_L03_P004" (solid, shelved, pour order 4): -2362.2,1968.5 2362.2,1968.5 2362.2,-1968.5 -2362.2,-1968.5
GND on Bottom Layer "NONET_L04_P006" (solid, remove dead copper, shelved, pour order 6): -2362.2,1968.5 -2362.2,-1968.5 2362.2,-1968.5 2362.2,1968.5 -2362.2,1968.5
GND on Top Layer "Top Layer-GND" (solid, pour order 8): -600,-60 -930,-60 -930,-400 -880,-450 -600,-450

## Other copper
Top Layer:
  region net NetL1_1: -1538.39,610.24 -1538.39,577.76 -1515.75,555.12 -1515.75,374.02 -1578.74,374.02 -1578.74,560.04 -1562.01,576.77 -1562.01,610.24
  region net 3V3: -1487.2,610.24 -1352.36,610.24 -1352.36,431.1 -1409.45,374.02 -1472.44,374.02 -1472.44,556.1 -1487.2,570.87
Layer 3:
  region net 1V2: -244.1,137.79 -251.97,130.66 -251.97,102.36 -304.13,154.53 -282.48,176.18

## Silkscreen, mask and mechanical layers (free items; w line width, h text height)
Top Overlay:
  text "5V" at -1399.61,848.43 h100
  text "JTAG" at -2133.86,433.07 h100
  text "3.3V" at -1467.52,269.9 h100
  text "2.5V" at -923.23,269.9 h100
  text "1.2V" at -1195.38,268.7 h100
Mechanical 1:
  lines w10: -2362.2,1968.5 -2362.2,-1968.5 2362.21,-1968.5 2362.21,1968.5 ; -2312.2,1968.5 2412.21,1968.5